# Altium PCB laser_driver2.PcbDoc (part 2 of 2)
Units mm, origin at the board's own origin, x right, y up, seen from the top; angles counter-clockwise.
Board outline 75 x 96.01 mm, 2 copper layers (TOP, BOTTOM), stack 0.264 mm thick; 144 components, 21 nets, 356 pads, 80 vias.
Unrouted connection lines stored in the file: 63.
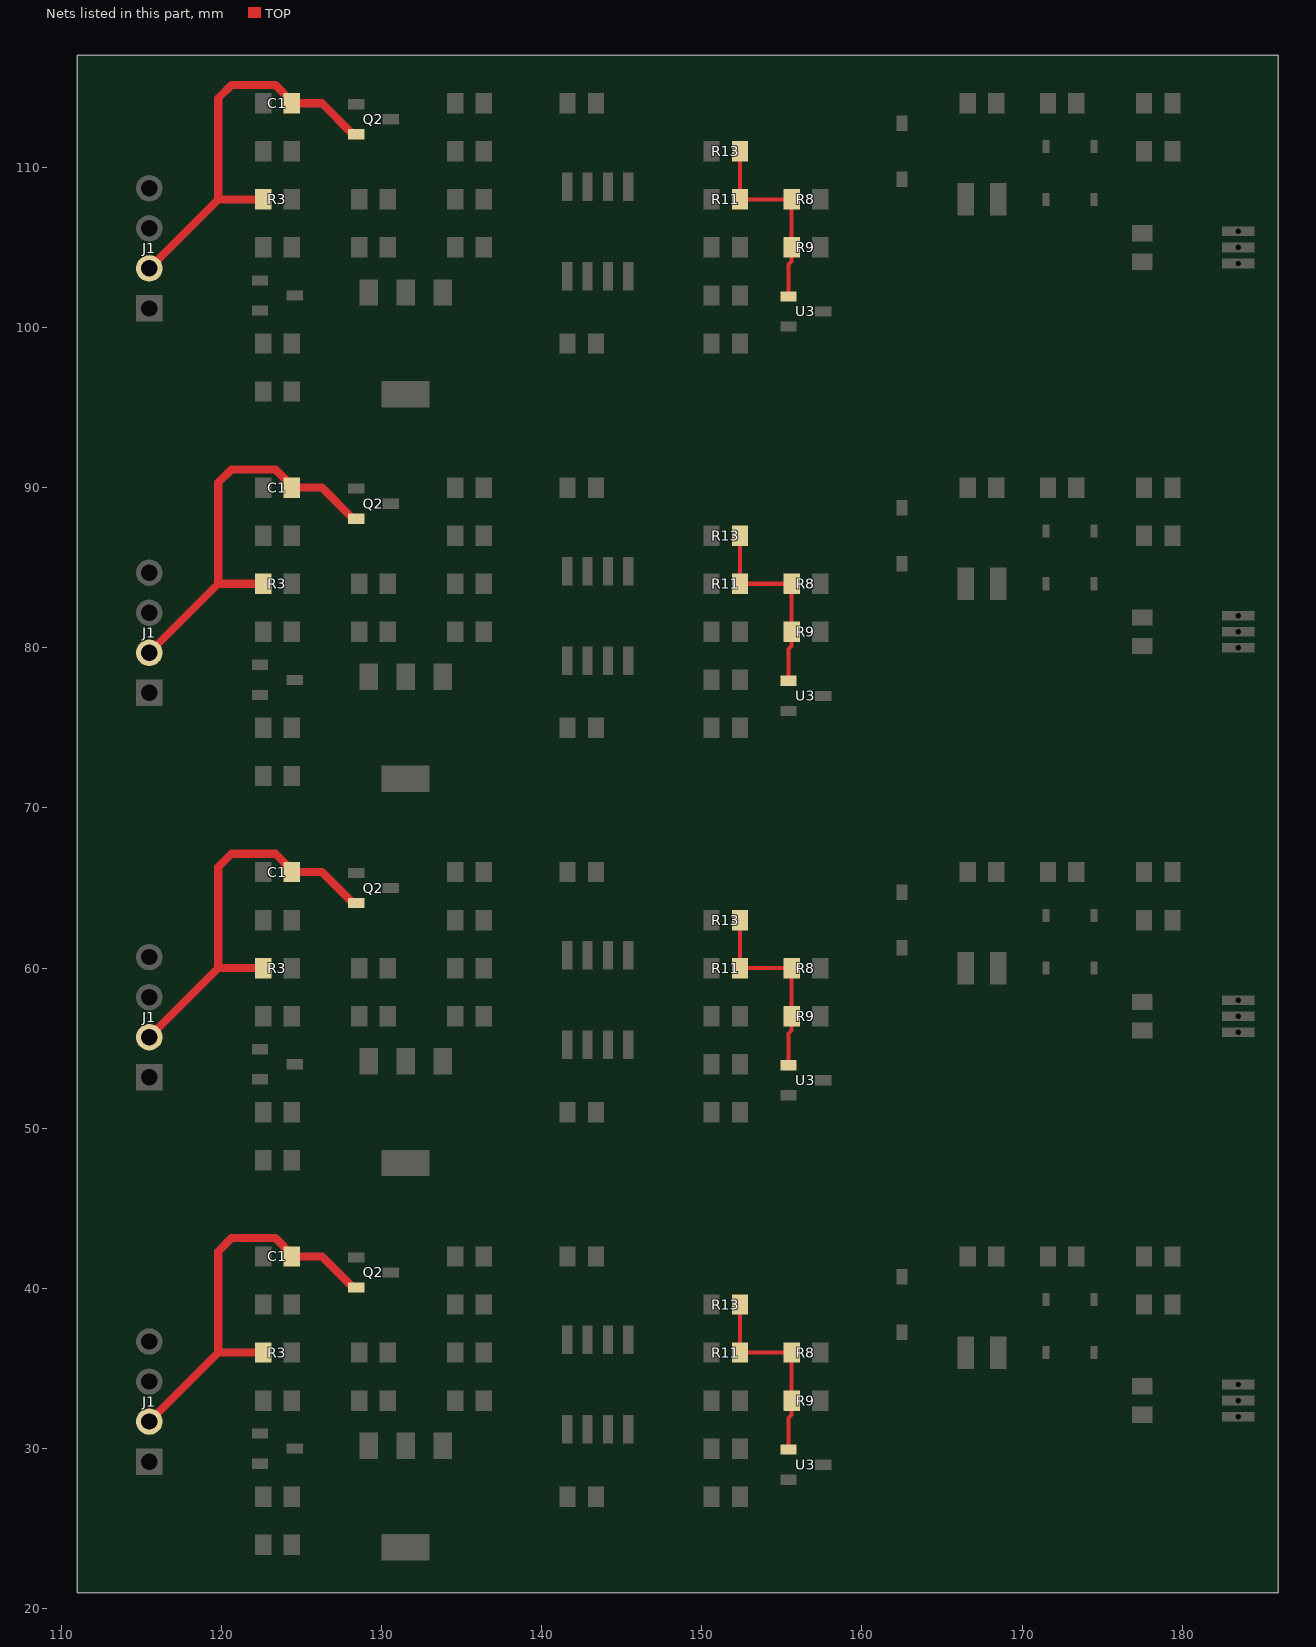
[diagram p2: the nets of this part, all layers, seen from the top]

## Via types
v1: diameter 0.61, hole 0.33, TOP to BOTTOM, 80 vias

## Nets (pads, with @x,y where several pads share a name; then routed paths per layer and width w, separated by ;. In a path a pad name is that pad's centre, name@x,y a point inside that pad or via, vN(x,y) a via of type N, cw(c..) or ccw(c..) an arc to the next point about the centre after c; other vN are vias at no path point) (continued)
VIN: C1.1 J1.2 Q2.2 R3.1 | length 102.1
  TOP w0.508: J1.2@115.5,31.681 119.81,35.991 ; J1.2@115.5,55.684 119.81,59.994 ; J1.2@115.5,79.687 119.81,83.997 ; J1.2@115.5,103.69 119.81,108 ; R3.1@122.611,35.991 119.81,35.991 ; R3.1@122.611,59.994 119.81,59.994 ; R3.1@122.611,83.997 119.81,83.997 ; R3.1@122.611,108 119.81,108 ; Q2.2@128.421,40.051 128.23,40.051 126.29,41.991 C1.1@124.389,41.991 124.389,42.118 123.373,43.134 120.643,43.134 119.81,42.301 119.81,35.991 ; Q2.2@128.421,64.054 128.23,64.054 126.29,65.994 C1.1@124.389,65.994 124.389,66.121 123.373,67.137 120.643,67.137 119.81,66.304 119.81,59.994 ; Q2.2@128.421,88.057 128.23,88.057 126.29,89.997 C1.1@124.389,89.997 124.389,90.124 123.373,91.14 120.643,91.14 119.81,90.307 119.81,83.997 ; Q2.2@128.421,112.06 128.23,112.06 126.29,114 C1.1@124.389,114 124.389,114.127 123.373,115.143 120.643,115.143 119.81,114.31 119.81,108
VREF: R8.2 R9.1 R11.1 R13.1 U3.1 | length 49.4
  TOP w0.254: R13.1@152.389,38.991 R11.1@152.389,35.991 R8.2@155.611,35.991 R9.1@155.611,32.991 155.611,32.102 155.42,31.912 U3.1@155.42,29.931 ; R13.1@152.389,62.994 R11.1@152.389,59.994 R8.2@155.611,59.994 R9.1@155.611,56.994 155.611,56.105 155.42,55.915 U3.1@155.42,53.934 ; R13.1@152.389,86.997 R11.1@152.389,83.997 R8.2@155.611,83.997 R9.1@155.611,80.997 155.611,80.108 155.42,79.918 U3.1@155.42,77.937 ; R13.1@152.389,111 R11.1@152.389,108 R8.2@155.611,108 R9.1@155.611,105 155.611,104.111 155.42,103.921 U3.1@155.42,101.94

## Polygon pours and split planes (outlines as drawn)
no net on TOP "TOP-No Net 7" (solid, pour order 16): 114.398,114 ccw(c113.5,114) 113.5,114.898 ccw(c113.5,114) 112.602,114 ccw(c113.5,114) 113.5,113.102 ccw(c113.5,114) 114.398,114
no net on TOP "TOP-No Net 6" (solid, pour order 14): 114.398,96 ccw(c113.5,96) 113.5,96.898 ccw(c113.5,96) 112.602,96 ccw(c113.5,96) 113.5,95.102 ccw(c113.5,96) 114.398,96
no net on TOP "TOP-No Net 5" (solid, pour order 12): 184.398,96 ccw(c183.5,96) 183.5,96.898 ccw(c183.5,96) 182.602,96 ccw(c183.5,96) 183.5,95.102 ccw(c183.5,96) 184.398,96
no net on TOP "TOP-No Net 4" (solid, pour order 10): 184.398,114 ccw(c183.5,114) 183.5,114.898 ccw(c183.5,114) 182.602,114 ccw(c183.5,114) 183.5,113.102 ccw(c183.5,114) 184.398,114
no net on TOP "TOP-No Net 3" (solid, pour order 6): 114.398,114 ccw(c113.5,114) 113.5,114.898 ccw(c113.5,114) 112.602,114 ccw(c113.5,114) 113.5,113.102 ccw(c113.5,114) 114.398,114
no net on TOP "TOP-No Net 2" (solid, pour order 4): 114.398,96 ccw(c113.5,96) 113.5,96.898 ccw(c113.5,96) 112.602,96 ccw(c113.5,96) 113.5,95.102 ccw(c113.5,96) 114.398,96
no net on TOP "TOP-No Net 1" (solid, pour order 2): 184.398,96 ccw(c183.5,96) 183.5,96.898 ccw(c183.5,96) 182.602,96 ccw(c183.5,96) 183.5,95.102 ccw(c183.5,96) 184.398,96
no net on TOP "TOP-No Net" (solid, pour order 0): 184.398,114 ccw(c183.5,114) 183.5,114.898 ccw(c183.5,114) 182.602,114 ccw(c183.5,114) 183.5,113.102 ccw(c183.5,114) 184.398,114
no net on TOP "TOP-No Net" (solid, pour order 18): 184.398,89.997 ccw(c183.5,89.997) 183.5,90.895 ccw(c183.5,89.997) 182.602,89.997 ccw(c183.5,89.997) 183.5,89.099 ccw(c183.5,89.997) 184.398,89.997
no net on TOP "TOP-No Net 1" (solid, pour order 20): 184.398,71.997 ccw(c183.5,71.997) 183.5,72.895 ccw(c183.5,71.997) 182.602,71.997 ccw(c183.5,71.997) 183.5,71.099 ccw(c183.5,71.997) 184.398,71.997
no net on TOP "TOP-No Net 2" (solid, pour order 22): 114.398,71.997 ccw(c113.5,71.997) 113.5,72.895 ccw(c113.5,71.997) 112.602,71.997 ccw(c113.5,71.997) 113.5,71.099 ccw(c113.5,71.997) 114.398,71.997
no net on TOP "TOP-No Net 3" (solid, pour order 24): 114.398,89.997 ccw(c113.5,89.997) 113.5,90.895 ccw(c113.5,89.997) 112.602,89.997 ccw(c113.5,89.997) 113.5,89.099 ccw(c113.5,89.997) 114.398,89.997
no net on TOP "TOP-No Net 4" (solid, pour order 26): 184.398,89.997 ccw(c183.5,89.997) 183.5,90.895 ccw(c183.5,89.997) 182.602,89.997 ccw(c183.5,89.997) 183.5,89.099 ccw(c183.5,89.997) 184.398,89.997
no net on TOP "TOP-No Net 5" (solid, pour order 28): 184.398,71.997 ccw(c183.5,71.997) 183.5,72.895 ccw(c183.5,71.997) 182.602,71.997 ccw(c183.5,71.997) 183.5,71.099 ccw(c183.5,71.997) 184.398,71.997
no net on TOP "TOP-No Net 6" (solid, pour order 30): 114.398,71.997 ccw(c113.5,71.997) 113.5,72.895 ccw(c113.5,71.997) 112.602,71.997 ccw(c113.5,71.997) 113.5,71.099 ccw(c113.5,71.997) 114.398,71.997
no net on TOP "TOP-No Net 7" (solid, pour order 32): 114.398,89.997 ccw(c113.5,89.997) 113.5,90.895 ccw(c113.5,89.997) 112.602,89.997 ccw(c113.5,89.997) 113.5,89.099 ccw(c113.5,89.997) 114.398,89.997
no net on TOP "TOP-No Net" (solid, pour order 36): 184.398,65.994 ccw(c183.5,65.994) 183.5,66.892 ccw(c183.5,65.994) 182.602,65.994 ccw(c183.5,65.994) 183.5,65.096 ccw(c183.5,65.994) 184.398,65.994
no net on TOP "TOP-No Net 1" (solid, pour order 38): 184.398,47.994 ccw(c183.5,47.994) 183.5,48.892 ccw(c183.5,47.994) 182.602,47.994 ccw(c183.5,47.994) 183.5,47.096 ccw(c183.5,47.994) 184.398,47.994
no net on TOP "TOP-No Net 2" (solid, pour order 40): 114.398,47.994 ccw(c113.5,47.994) 113.5,48.892 ccw(c113.5,47.994) 112.602,47.994 ccw(c113.5,47.994) 113.5,47.096 ccw(c113.5,47.994) 114.398,47.994
no net on TOP "TOP-No Net 3" (solid, pour order 42): 114.398,65.994 ccw(c113.5,65.994) 113.5,66.892 ccw(c113.5,65.994) 112.602,65.994 ccw(c113.5,65.994) 113.5,65.096 ccw(c113.5,65.994) 114.398,65.994
no net on TOP "TOP-No Net 4" (solid, pour order 44): 184.398,65.994 ccw(c183.5,65.994) 183.5,66.892 ccw(c183.5,65.994) 182.602,65.994 ccw(c183.5,65.994) 183.5,65.096 ccw(c183.5,65.994) 184.398,65.994
no net on TOP "TOP-No Net 5" (solid, pour order 46): 184.398,47.994 ccw(c183.5,47.994) 183.5,48.892 ccw(c183.5,47.994) 182.602,47.994 ccw(c183.5,47.994) 183.5,47.096 ccw(c183.5,47.994) 184.398,47.994
no net on TOP "TOP-No Net 6" (solid, pour order 48): 114.398,47.994 ccw(c113.5,47.994) 113.5,48.892 ccw(c113.5,47.994) 112.602,47.994 ccw(c113.5,47.994) 113.5,47.096 ccw(c113.5,47.994) 114.398,47.994
no net on TOP "TOP-No Net 7" (solid, pour order 50): 114.398,65.994 ccw(c113.5,65.994) 113.5,66.892 ccw(c113.5,65.994) 112.602,65.994 ccw(c113.5,65.994) 113.5,65.096 ccw(c113.5,65.994) 114.398,65.994
no net on TOP "TOP-No Net" (solid, pour order 54): 184.398,41.991 ccw(c183.5,41.991) 183.5,42.889 ccw(c183.5,41.991) 182.602,41.991 ccw(c183.5,41.991) 183.5,41.093 ccw(c183.5,41.991) 184.398,41.991
no net on TOP "TOP-No Net 1" (solid, pour order 56): 184.398,23.991 ccw(c183.5,23.991) 183.5,24.889 ccw(c183.5,23.991) 182.602,23.991 ccw(c183.5,23.991) 183.5,23.093 ccw(c183.5,23.991) 184.398,23.991
no net on TOP "TOP-No Net 2" (solid, pour order 58): 114.398,23.991 ccw(c113.5,23.991) 113.5,24.889 ccw(c113.5,23.991) 112.602,23.991 ccw(c113.5,23.991) 113.5,23.093 ccw(c113.5,23.991) 114.398,23.991
no net on TOP "TOP-No Net 3" (solid, pour order 60): 114.398,41.991 ccw(c113.5,41.991) 113.5,42.889 ccw(c113.5,41.991) 112.602,41.991 ccw(c113.5,41.991) 113.5,41.093 ccw(c113.5,41.991) 114.398,41.991
no net on TOP "TOP-No Net 4" (solid, pour order 62): 184.398,41.991 ccw(c183.5,41.991) 183.5,42.889 ccw(c183.5,41.991) 182.602,41.991 ccw(c183.5,41.991) 183.5,41.093 ccw(c183.5,41.991) 184.398,41.991
no net on TOP "TOP-No Net 5" (solid, pour order 64): 184.398,23.991 ccw(c183.5,23.991) 183.5,24.889 ccw(c183.5,23.991) 182.602,23.991 ccw(c183.5,23.991) 183.5,23.093 ccw(c183.5,23.991) 184.398,23.991
no net on TOP "TOP-No Net 6" (solid, pour order 66): 114.398,23.991 ccw(c113.5,23.991) 113.5,24.889 ccw(c113.5,23.991) 112.602,23.991 ccw(c113.5,23.991) 113.5,23.093 ccw(c113.5,23.991) 114.398,23.991
no net on TOP "TOP-No Net 7" (solid, pour order 68): 114.398,41.991 ccw(c113.5,41.991) 113.5,42.889 ccw(c113.5,41.991) 112.602,41.991 ccw(c113.5,41.991) 113.5,41.093 ccw(c113.5,41.991) 114.398,41.991
GND on BOTTOM "BOTTOM-GND" (solid, pour order 8): 118.5,94 118.5,96 116.5,98 112,98 112,110 115.5,110 120.5,115 120.5,116 180.5,116 180.5,115 181.5,114 181.5,112 182.5,111 183.5,111 185,109.5 185,104 184.643,104 184.643,104.432 182.357,104.432 182.357,104 181.934,104 181.93,104.046 181.924,104.083 181.915,104.119 181.903,104.155 181.888,104.19 181.87,104.223 181.849,104.254 181.826,104.284 181.8,104.311 181.772,104.336 181.741,104.358 181.709,104.378 181.675,104.395 181.64,104.409 181.604,104.419 181.567,104.427 181.53,104.431 181.492,104.432 181.454,104.43 181.417,104.424 181.381,104.415 181.345,104.403 181.31,104.388 181.277,104.37 181.246,104.349 181.216,104.326 181.189,104.3 181.164,104.272 181.142,104.241 181.122,104.209 181.105,104.175 181.091,104.14 181.081,104.104 181.073,104.067 181.07,104.046 181.066,104 180.5,104 180.5,102 176.5,98 153.5,98 151.5,100 151.5,102 150.5,103 148.5,103 147.5,102 145.5,102 144.5,103 144.5,104 146.5,104 147.5,105 147.5,109 146.5,110 141.5,110 137.5,106 137.5,98 133.5,94 118.5,94
GND on BOTTOM "BOTTOM-GND" (solid, pour order 34): 118.5,69.997 118.5,71.997 116.5,73.997 112,73.997 112,85.997 115.5,85.997 120.5,90.997 120.5,91.997 180.5,91.997 180.5,90.997 181.5,89.997 181.5,87.997 182.5,86.997 183.5,86.997 185,85.497 185,79.997 184.643,79.997 184.643,80.429 182.357,80.429 182.357,79.997 181.934,79.997 181.93,80.043 181.924,80.08 181.915,80.116 181.903,80.152 181.888,80.187 181.87,80.22 181.849,80.251 181.826,80.281 181.8,80.308 181.772,80.333 181.741,80.355 181.709,80.375 181.675,80.392 181.64,80.406 181.604,80.416 181.567,80.424 181.53,80.428 181.492,80.429 181.454,80.427 181.417,80.421 181.381,80.412 181.345,80.4 181.31,80.385 181.277,80.367 181.246,80.346 181.216,80.323 181.189,80.297 181.164,80.269 181.142,80.238 181.122,80.206 181.105,80.172 181.091,80.137 181.081,80.101 181.073,80.064 181.07,80.043 181.066,79.997 180.5,79.997 180.5,77.997 176.5,73.997 153.5,73.997 151.5,75.997 151.5,77.997 150.5,78.997 148.5,78.997 147.5,77.997 145.5,77.997 144.5,78.997 144.5,79.997 146.5,79.997 147.5,80.997 147.5,84.997 146.5,85.997 141.5,85.997 137.5,81.997 137.5,73.997 133.5,69.997 118.5,69.997
GND on BOTTOM "BOTTOM-GND" (solid, pour order 52): 118.5,45.994 118.5,47.994 116.5,49.994 112,49.994 112,61.994 115.5,61.994 120.5,66.994 120.5,67.994 180.5,67.994 180.5,66.994 181.5,65.994 181.5,63.994 182.5,62.994 183.5,62.994 185,61.494 185,55.994 184.643,55.994 184.643,56.426 182.357,56.426 182.357,55.994 181.934,55.994 181.93,56.04 181.924,56.077 181.915,56.113 181.903,56.149 181.888,56.184 181.87,56.217 181.849,56.248 181.826,56.278 181.8,56.305 181.772,56.33 181.741,56.352 181.709,56.372 181.675,56.389 181.64,56.403 181.604,56.413 181.567,56.421 181.53,56.425 181.492,56.426 181.454,56.424 181.417,56.418 181.381,56.409 181.345,56.397 181.31,56.382 181.277,56.364 181.246,56.343 181.216,56.32 181.189,56.294 181.164,56.266 181.142,56.235 181.122,56.203 181.105,56.169 181.091,56.134 181.081,56.098 181.073,56.061 181.07,56.04 181.066,55.994 180.5,55.994 180.5,53.994 176.5,49.994 153.5,49.994 151.5,51.994 151.5,53.994 150.5,54.994 148.5,54.994 147.5,53.994 145.5,53.994 144.5,54.994 144.5,55.994 146.5,55.994 147.5,56.994 147.5,60.994 146.5,61.994 141.5,61.994 137.5,57.994 137.5,49.994 133.5,45.994 118.5,45.994
GND on BOTTOM "BOTTOM-GND" (solid, pour order 70): 118.5,21.991 118.5,23.991 116.5,25.991 112,25.991 112,37.991 115.5,37.991 120.5,42.991 120.5,43.991 180.5,43.991 180.5,42.991 181.5,41.991 181.5,39.991 182.5,38.991 183.5,38.991 185,37.491 185,31.991 184.643,31.991 184.643,32.423 182.357,32.423 182.357,31.991 181.934,31.991 181.93,32.037 181.924,32.074 181.915,32.11 181.903,32.146 181.888,32.181 181.87,32.214 181.849,32.245 181.826,32.275 181.8,32.302 181.772,32.327 181.741,32.349 181.709,32.369 181.675,32.386 181.64,32.4 181.604,32.41 181.567,32.418 181.53,32.422 181.492,32.423 181.454,32.421 181.417,32.415 181.381,32.406 181.345,32.394 181.31,32.379 181.277,32.361 181.246,32.34 181.216,32.317 181.189,32.291 181.164,32.263 181.142,32.232 181.122,32.2 181.105,32.166 181.091,32.131 181.081,32.095 181.073,32.058 181.07,32.037 181.066,31.991 180.5,31.991 180.5,29.991 176.5,25.991 153.5,25.991 151.5,27.991 151.5,29.991 150.5,30.991 148.5,30.991 147.5,29.991 145.5,29.991 144.5,30.991 144.5,31.991 146.5,31.991 147.5,32.991 147.5,36.991 146.5,37.991 141.5,37.991 137.5,33.991 137.5,25.991 133.5,21.991 118.5,21.991
no net on Top Solder (solid): 114.416,114 ccw(c113.5,114) 113.5,114.916 ccw(c113.5,114) 112.584,114 ccw(c113.5,114) 113.5,113.084 ccw(c113.5,114) 114.416,114
no net on Top Solder (solid): 114.416,96 ccw(c113.5,96) 113.5,96.916 ccw(c113.5,96) 112.584,96 ccw(c113.5,96) 113.5,95.084 ccw(c113.5,96) 114.416,96
no net on Top Solder (solid): 184.416,96 ccw(c183.5,96) 183.5,96.916 ccw(c183.5,96) 182.584,96 ccw(c183.5,96) 183.5,95.084 ccw(c183.5,96) 184.416,96
no net on Top Solder (solid): 184.416,114 ccw(c183.5,114) 183.5,114.916 ccw(c183.5,114) 182.584,114 ccw(c183.5,114) 183.5,113.084 ccw(c183.5,114) 184.416,114
no net on Top Solder (solid): 184.416,89.997 ccw(c183.5,89.997) 183.5,90.913 ccw(c183.5,89.997) 182.584,89.997 ccw(c183.5,89.997) 183.5,89.081 ccw(c183.5,89.997) 184.416,89.997
no net on Top Solder (solid): 184.416,71.997 ccw(c183.5,71.997) 183.5,72.913 ccw(c183.5,71.997) 182.584,71.997 ccw(c183.5,71.997) 183.5,71.081 ccw(c183.5,71.997) 184.416,71.997
no net on Top Solder (solid): 114.416,71.997 ccw(c113.5,71.997) 113.5,72.913 ccw(c113.5,71.997) 112.584,71.997 ccw(c113.5,71.997) 113.5,71.081 ccw(c113.5,71.997) 114.416,71.997
no net on Top Solder (solid): 114.416,89.997 ccw(c113.5,89.997) 113.5,90.913 ccw(c113.5,89.997) 112.584,89.997 ccw(c113.5,89.997) 113.5,89.081 ccw(c113.5,89.997) 114.416,89.997
no net on Top Solder (solid): 184.416,65.994 ccw(c183.5,65.994) 183.5,66.91 ccw(c183.5,65.994) 182.584,65.994 ccw(c183.5,65.994) 183.5,65.078 ccw(c183.5,65.994) 184.416,65.994
no net on Top Solder (solid): 184.416,47.994 ccw(c183.5,47.994) 183.5,48.91 ccw(c183.5,47.994) 182.584,47.994 ccw(c183.5,47.994) 183.5,47.078 ccw(c183.5,47.994) 184.416,47.994
no net on Top Solder (solid): 114.416,47.994 ccw(c113.5,47.994) 113.5,48.91 ccw(c113.5,47.994) 112.584,47.994 ccw(c113.5,47.994) 113.5,47.078 ccw(c113.5,47.994) 114.416,47.994
no net on Top Solder (solid): 114.416,65.994 ccw(c113.5,65.994) 113.5,66.91 ccw(c113.5,65.994) 112.584,65.994 ccw(c113.5,65.994) 113.5,65.078 ccw(c113.5,65.994) 114.416,65.994
no net on Top Solder (solid): 184.416,41.991 ccw(c183.5,41.991) 183.5,42.907 ccw(c183.5,41.991) 182.584,41.991 ccw(c183.5,41.991) 183.5,41.075 ccw(c183.5,41.991) 184.416,41.991
no net on Top Solder (solid): 184.416,23.991 ccw(c183.5,23.991) 183.5,24.907 ccw(c183.5,23.991) 182.584,23.991 ccw(c183.5,23.991) 183.5,23.075 ccw(c183.5,23.991) 184.416,23.991
no net on Top Solder (solid): 114.416,23.991 ccw(c113.5,23.991) 113.5,24.907 ccw(c113.5,23.991) 112.584,23.991 ccw(c113.5,23.991) 113.5,23.075 ccw(c113.5,23.991) 114.416,23.991
no net on Top Solder (solid): 114.416,41.991 ccw(c113.5,41.991) 113.5,42.907 ccw(c113.5,41.991) 112.584,41.991 ccw(c113.5,41.991) 113.5,41.075 ccw(c113.5,41.991) 114.416,41.991

## Keep-outs
TOP:
  circle w0.025: c113.5,114 r1.524
  circle w0.025: c113.5,96 r1.524
  circle w0.025: c183.5,96 r1.524
  circle w0.025: c183.5,114 r1.524
  circle w0.025: c113.5,114 r1.524
  circle w0.025: c113.5,96 r1.524
  circle w0.025: c183.5,96 r1.524
  circle w0.025: c183.5,114 r1.524
  circle w0.025: c183.5,89.997 r1.524
  circle w0.025: c183.5,71.997 r1.524
  circle w0.025: c113.5,71.997 r1.524
  circle w0.025: c113.5,89.997 r1.524
  circle w0.025: c183.5,89.997 r1.524
  circle w0.025: c183.5,71.997 r1.524
  circle w0.025: c113.5,71.997 r1.524
  circle w0.025: c113.5,89.997 r1.524
  circle w0.025: c183.5,65.994 r1.524
  circle w0.025: c183.5,47.994 r1.524
  circle w0.025: c113.5,47.994 r1.524
  circle w0.025: c113.5,65.994 r1.524
  circle w0.025: c183.5,65.994 r1.524
  circle w0.025: c183.5,47.994 r1.524
  circle w0.025: c113.5,47.994 r1.524
  circle w0.025: c113.5,65.994 r1.524
  circle w0.025: c183.5,41.991 r1.524
  circle w0.025: c183.5,23.991 r1.524
  circle w0.025: c113.5,23.991 r1.524
  circle w0.025: c113.5,41.991 r1.524
  circle w0.025: c183.5,41.991 r1.524
  circle w0.025: c183.5,23.991 r1.524
  circle w0.025: c113.5,23.991 r1.524
  circle w0.025: c113.5,41.991 r1.524

## Other copper
TOP:
  region net GND: 172.745,107.594 172.745,108.406 172.135,108.406 172.135,111.708 173.862,111.708 173.862,108.406 173.253,108.406 173.253,107.594 172.745,107.594
  region net GND: 172.745,83.591 172.745,84.403 172.135,84.403 172.135,87.705 173.862,87.705 173.862,84.403 173.253,84.403 173.253,83.591 172.745,83.591
  region net GND: 172.745,59.588 172.745,60.4 172.135,60.4 172.135,63.702 173.862,63.702 173.862,60.4 173.253,60.4 173.253,59.588 172.745,59.588
  region net GND: 172.745,35.585 172.745,36.397 172.135,36.397 172.135,39.699 173.862,39.699 173.862,36.397 173.253,36.397 173.253,35.585 172.745,35.585
BOTTOM:
  pour cut-out: 0,0 0.254,0 0.254,0.254 0,0.254
  pour cut-out: 0,0 0.254,0 0.254,0.254 0,0.254
  pour cut-out: 0,0 0.254,0 0.254,0.254 0,0.254
  pour cut-out: 0,0 0.254,0 0.254,0.254 0,0.254
  pour cut-out: 116.461,103.69 116.428,103.939 116.332,104.171 116.179,104.37 115.98,104.522 115.749,104.618 115.5,104.651 115.251,104.618 115.02,104.522 114.821,104.37 114.668,104.171 114.572,103.939 114.539,103.69 114.572,103.441 114.668,103.21 114.821,103.011 115.02,102.858 115.251,102.762 115.5,102.729 115.749,102.762 115.98,102.858 116.179,103.011 116.332,103.21 116.428,103.441 116.461,103.69
  pour cut-out: 116.461,106.19 116.428,106.439 116.332,106.67 116.179,106.869 115.98,107.022 115.749,107.118 115.5,107.151 115.251,107.118 115.02,107.022 114.821,106.869 114.668,106.67 114.572,106.439 114.539,106.19 114.572,105.941 114.668,105.71 114.821,105.511 115.02,105.358 115.251,105.262 115.5,105.229 115.749,105.262 115.98,105.358 116.179,105.511 116.332,105.71 116.428,105.941 116.461,106.19
  pour cut-out: 0,0 0.254,0 0.254,0.254 0,0.254
  pour cut-out: 0,0 0.254,0 0.254,0.254 0,0.254
  pour cut-out: 0,0 0.254,0 0.254,0.254 0,0.254
  pour cut-out: 0,0 0.254,0 0.254,0.254 0,0.254
  pour cut-out: 0,0 0.254,0 0.254,0.254 0,0.254
  pour cut-out: 0,0 0.254,0 0.254,0.254 0,0.254
  pour cut-out: 0,0 0.254,0 0.254,0.254 0,0.254
  pour cut-out: 0,0 0.254,0 0.254,0.254 0,0.254
  pour cut-out: 0,0 0.254,0 0.254,0.254 0,0.254
  pour cut-out: 0,0 0.254,0 0.254,0.254 0,0.254
  pour cut-out: 0,0 0.254,0 0.254,0.254 0,0.254
  pour cut-out: 0,0 0.254,0 0.254,0.254 0,0.254
  pour cut-out: 0,0 0.254,0 0.254,0.254 0,0.254
  pour cut-out: 0,0 0.254,0 0.254,0.254 0,0.254
  pour cut-out: 0,0 0.254,0 0.254,0.254 0,0.254
  pour cut-out: 0,0 0.254,0 0.254,0.254 0,0.254
  pour cut-out: 0,0 0.254,0 0.254,0.254 0,0.254
  pour cut-out: 0,0 0.254,0 0.254,0.254 0,0.254
  pour cut-out: 0,0 0.254,0 0.254,0.254 0,0.254
  pour cut-out: 0,0 0.254,0 0.254,0.254 0,0.254
  pour cut-out: 0,0 0.254,0 0.254,0.254 0,0.254
  pour cut-out: 0,0 0.254,0 0.254,0.254 0,0.254
  pour cut-out: 0,0 0.254,0 0.254,0.254 0,0.254
  pour cut-out: 0,0 0.254,0 0.254,0.254 0,0.254
  pour cut-out: 0,0 0.254,0 0.254,0.254 0,0.254
  pour cut-out: 0,0 0.254,0 0.254,0.254 0,0.254
  pour cut-out: 0,0 0.254,0 0.254,0.254 0,0.254
  pour cut-out: 0,0 0.254,0 0.254,0.254 0,0.254
  pour cut-out: 0,0 0.254,0 0.254,0.254 0,0.254
  pour cut-out: 0,0 0.254,0 0.254,0.254 0,0.254
  pour cut-out: 0,0 0.254,0 0.254,0.254 0,0.254
  pour cut-out: 0,0 0.254,0 0.254,0.254 0,0.254
  pour cut-out: 0,0 0.254,0 0.254,0.254 0,0.254
  pour cut-out: 0,0 0.254,0 0.254,0.254 0,0.254
  pour cut-out: 0,0 0.254,0 0.254,0.254 0,0.254
  pour cut-out: 0,0 0.254,0 0.254,0.254 0,0.254
  pour cut-out: 0,0 0.254,0 0.254,0.254 0,0.254
  pour cut-out: 0,0 0.254,0 0.254,0.254 0,0.254
  pour cut-out: 0,0 0.254,0 0.254,0.254 0,0.254
  pour cut-out: 0,0 0.254,0 0.254,0.254 0,0.254
  pour cut-out: 0,0 0.254,0 0.254,0.254 0,0.254
  pour cut-out: 0,0 0.254,0 0.254,0.254 0,0.254
  pour cut-out: 0,0 0.254,0 0.254,0.254 0,0.254
  pour cut-out: 0,0 0.254,0 0.254,0.254 0,0.254
  pour cut-out: 0,0 0.254,0 0.254,0.254 0,0.254
  pour cut-out: 0,0 0.254,0 0.254,0.254 0,0.254
  pour cut-out: 0,0 0.254,0 0.254,0.254 0,0.254
  pour cut-out: 0,0 0.254,0 0.254,0.254 0,0.254
  pour cut-out: 0,0 0.254,0 0.254,0.254 0,0.254
  pour cut-out: 0,0 0.254,0 0.254,0.254 0,0.254
  pour cut-out: 0,0 0.254,0 0.254,0.254 0,0.254
  pour cut-out: 0,0 0.254,0 0.254,0.254 0,0.254
  pour cut-out: 0,0 0.254,0 0.254,0.254 0,0.254
  pour cut-out: 0,0 0.254,0 0.254,0.254 0,0.254
  pour cut-out: 0,0 0.254,0 0.254,0.254 0,0.254
  pour cut-out: 116.461,82.187 116.428,82.436 116.332,82.667 116.179,82.866 115.98,83.019 115.749,83.115 115.5,83.148 115.251,83.115 115.02,83.019 114.821,82.866 114.668,82.667 114.572,82.436 114.539,82.187 114.572,81.938 114.668,81.707 114.821,81.508 115.02,81.355 115.251,81.259 115.5,81.226 115.749,81.259 115.98,81.355 116.179,81.508 116.332,81.707 116.428,81.938 116.461,82.187
  pour cut-out: 116.461,79.687 116.428,79.936 116.332,80.168 116.179,80.367 115.98,80.519 115.749,80.615 115.5,80.648 115.251,80.615 115.02,80.519 114.821,80.367 114.668,80.168 114.572,79.936 114.539,79.687 114.572,79.438 114.668,79.207 114.821,79.008 115.02,78.855 115.251,78.759 115.5,78.726 115.749,78.759 115.98,78.855 116.179,79.008 116.332,79.207 116.428,79.438 116.461,79.687
  pour cut-out: 116.461,58.184 116.428,58.433 116.332,58.664 116.179,58.863 115.98,59.016 115.749,59.112 115.5,59.145 115.251,59.112 115.02,59.016 114.821,58.863 114.668,58.664 114.572,58.433 114.539,58.184 114.572,57.935 114.668,57.704 114.821,57.505 115.02,57.352 115.251,57.256 115.5,57.223 115.749,57.256 115.98,57.352 116.179,57.505 116.332,57.704 116.428,57.935 116.461,58.184
  pour cut-out: 116.461,55.684 116.428,55.933 116.332,56.165 116.179,56.364 115.98,56.516 115.749,56.612 115.5,56.645 115.251,56.612 115.02,56.516 114.821,56.364 114.668,56.165 114.572,55.933 114.539,55.684 114.572,55.435 114.668,55.204 114.821,55.005 115.02,54.852 115.251,54.756 115.5,54.723 115.749,54.756 115.98,54.852 116.179,55.005 116.332,55.204 116.428,55.435 116.461,55.684
  pour cut-out: 116.461,34.181 116.428,34.43 116.332,34.661 116.179,34.86 115.98,35.013 115.749,35.109 115.5,35.142 115.251,35.109 115.02,35.013 114.821,34.86 114.668,34.661 114.572,34.43 114.539,34.181 114.572,33.932 114.668,33.701 114.821,33.502 115.02,33.349 115.251,33.253 115.5,33.22 115.749,33.253 115.98,33.349 116.179,33.502 116.332,33.701 116.428,33.932 116.461,34.181
  pour cut-out: 116.461,31.681 116.428,31.93 116.332,32.162 116.179,32.361 115.98,32.513 115.749,32.609 115.5,32.642 115.251,32.609 115.02,32.513 114.821,32.361 114.668,32.162 114.572,31.93 114.539,31.681 114.572,31.432 114.668,31.201 114.821,31.002 115.02,30.849 115.251,30.753 115.5,30.72 115.749,30.753 115.98,30.849 116.179,31.002 116.332,31.201 116.428,31.432 116.461,31.681
Multi-Layer:
  lines w0.025: 112,21.991 185,21.991 ; 112,21.991 112,43.991 ; 112,21.991 185,21.991 ; 112,21.991 112,43.991 ; 112,43.991 185,43.991 ; 112,43.991 185,43.991 ; 112,45.994 185,45.994 ; 112,45.994 112,67.994 ; 112,45.994 185,45.994 ; 112,45.994 112,67.994 ; 112,67.994 185,67.994 ; 112,67.994 185,67.994 ; 112,69.997 185,69.997 ; 112,69.997 112,91.997 ; 112,69.997 185,69.997 ; 112,69.997 112,91.997 ; 112,91.997 185,91.997 ; 112,91.997 185,91.997 ; 112,94 112,116 ; 112,94 185,94 ; 112,94 112,116 ; 112,94 185,94 ; 112,116 185,116 ; 112,116 185,116 ; 185,21.991 185,43.991 ; 185,21.991 185,43.991 ; 185,45.994 185,67.994 ; 185,45.994 185,67.994 ; 185,69.997 185,91.997 ; 185,69.997 185,91.997 ; 185,94 185,116 ; 185,94 185,116

## Silkscreen, mask and mechanical layers (free items; w line width, h text height)
Top Overlay:
  text "LASER DRIVER BOARD V1.0" at 151.257,95.377 h1
  text "LASER DRIVER BOARD V1.0" at 151.257,71.247 h1
  text "LASER DRIVER BOARD V1.0" at 151.13,47.371 h1
  text "LASER DRIVER BOARD V1.0" at 151.257,23.495 h1
Top Solder:
  pour cut-out: 172.618,107.467 172.618,108.279 172.008,108.279 172.008,111.835 173.989,111.835 173.989,108.279 173.38,108.279 173.38,107.467 172.618,107.467
  pour cut-out: 172.618,83.464 172.618,84.276 172.008,84.276 172.008,87.832 173.989,87.832 173.989,84.276 173.38,84.276 173.38,83.464 172.618,83.464
  pour cut-out: 172.618,59.461 172.618,60.273 172.008,60.273 172.008,63.829 173.989,63.829 173.989,60.273 173.38,60.273 173.38,59.461 172.618,59.461
  pour cut-out: 172.618,35.458 172.618,36.27 172.008,36.27 172.008,39.826 173.989,39.826 173.989,36.27 173.38,36.27 173.38,35.458 172.618,35.458
NCLEGEND-1-2:
  lines w0.025: 195.5,90.1 318.334,90.1 ; 195.5,96.45 318.334,96.45 ; 195.5,102.8 318.334,102.8 ; 195.5,109.15 318.334,109.15 ; 195.5,115.5 318.334,115.5 ; 218.335,83.75 218.335,109.15 ; 266.366,83.75 266.366,109.15 ; 298.649,83.75 298.649,109.15 ; 195.5,83.75 195.5,122 318.334,122 318.334,83.75 195.5,83.75 ; 206.409,86.925 206.663,86.417 207.171,86.417 207.425,86.925 207.171,87.433 206.663,87.433 206.409,86.925 ; 206.663,93.021 206.663,93.529 207.171,93.529 207.171,93.021 206.663,93.021 ; 206.752,99.46 207.082,99.46 207.082,99.79 206.752,99.79 206.752,99.46
  text "DRILL CHART: TOP to BOTTOM" at 223.897,117.237 h3.17
  text "ALL UNITS ARE IN MILLIMETERS" at 221.357,110.738 h3.17
  text "FIGURE" at 199.297,104.388 h3.17
  text "SIZE" at 237.27,104.388 h3.17
  text "PLATED" at 274.888,104.388 h3.17
  text "QTY" at 304.682,104.388 h3.17
  text "0.3302" at 234.73,98.038 h3.17
  text "PLATED" at 274.888,98.038 h3.17
  text "20" at 305.952,98.038 h3.17
  text "0.3302" at 234.73,91.688 h3.17
  text "PLATED" at 274.888,91.688 h3.17
  text "3" at 307.222,91.688 h3.17
  text "1.016" at 236,85.338 h3.17
  text "PLATED" at 274.888,85.338 h3.17
  text "4" at 307.222,85.338 h3.17
OUTLINE:
  lines w0.025: 111,20.991 111,44.991 186,44.991 186,20.991 111,20.991 ; 111,44.994 111,68.994 186,68.994 186,44.994 111,44.994 ; 111,68.997 111,92.997 186,92.997 186,68.997 111,68.997 ; 111,93 186,93 186,117 111,117 111,93
AUTOSILK_TOP:
  text "LASER DRIVER BOARD V1.0" at 164.5,99 h0.79
  text "LASER DRIVER BOARD V1.0" at 164.5,74.997 h0.79
  text "LASER DRIVER BOARD V1.0" at 164.5,50.994 h0.79
  text "LASER DRIVER BOARD V1.0" at 164.5,26.991 h0.79
DRAWING_ORIGIN:
  lines w0.025: 148.3,32.991 148.7,32.991 ; 148.3,56.994 148.7,56.994 ; 148.3,80.997 148.7,80.997 ; 148.3,105 148.7,105 ; 148.5,32.791 148.5,33.191 ; 148.5,56.794 148.5,57.194 ; 148.5,80.797 148.5,81.197 ; 148.5,104.8 148.5,105.2

## Text inside footprints (layer, text, board x,y; h text height)
C1: PIN_NUMBER "1" at 124.074,114 h0.79 r180; PIN_NUMBER "2" at 122.296,114 h0.79 r180; DIMENSION "80" at 123.805,115.651 h0.51 r180; DIMENSION "50" at 121.595,114.229 h0.51 r180
C1: PIN_NUMBER "1" at 124.074,89.997 h0.79 r180; PIN_NUMBER "2" at 122.296,89.997 h0.79 r180; DIMENSION "80" at 123.805,91.648 h0.51 r180; DIMENSION "50" at 121.595,90.226 h0.51 r180
C1: PIN_NUMBER "1" at 124.074,65.994 h0.79 r180; PIN_NUMBER "2" at 122.296,65.994 h0.79 r180; DIMENSION "80" at 123.805,67.645 h0.51 r180; DIMENSION "50" at 121.595,66.223 h0.51 r180
C1: PIN_NUMBER "1" at 124.074,41.991 h0.79 r180; PIN_NUMBER "2" at 122.296,41.991 h0.79 r180; DIMENSION "80" at 123.805,43.642 h0.51 r180; DIMENSION "50" at 121.595,42.22 h0.51 r180
C2: PIN_NUMBER "2" at 128.296,108 h0.79 r180; PIN_NUMBER "1" at 130.074,108 h0.79 r180; DIMENSION "80" at 129.805,109.651 h0.51 r180; DIMENSION "50" at 127.595,108.229 h0.51 r180
C2: PIN_NUMBER "2" at 128.296,83.997 h0.79 r180; PIN_NUMBER "1" at 130.074,83.997 h0.79 r180; DIMENSION "80" at 129.805,85.648 h0.51 r180; DIMENSION "50" at 127.595,84.226 h0.51 r180
C2: PIN_NUMBER "2" at 128.296,59.994 h0.79 r180; PIN_NUMBER "1" at 130.074,59.994 h0.79 r180; DIMENSION "80" at 129.805,61.645 h0.51 r180; DIMENSION "50" at 127.595,60.223 h0.51 r180
C2: PIN_NUMBER "2" at 128.296,35.991 h0.79 r180; PIN_NUMBER "1" at 130.074,35.991 h0.79 r180; DIMENSION "80" at 129.805,37.642 h0.51 r180; DIMENSION "50" at 127.595,36.22 h0.51 r180
C3: PIN_NUMBER "2" at 128.296,105 h0.79 r180; PIN_NUMBER "1" at 130.074,105 h0.79 r180; DIMENSION "80" at 129.805,106.651 h0.51 r180; DIMENSION "50" at 127.595,105.229 h0.51 r180
C3: PIN_NUMBER "2" at 128.296,80.997 h0.79 r180; PIN_NUMBER "1" at 130.074,80.997 h0.79 r180; DIMENSION "80" at 129.805,82.648 h0.51 r180; DIMENSION "50" at 127.595,81.226 h0.51 r180
C3: PIN_NUMBER "2" at 128.296,56.994 h0.79 r180; PIN_NUMBER "1" at 130.074,56.994 h0.79 r180; DIMENSION "80" at 129.805,58.645 h0.51 r180; DIMENSION "50" at 127.595,57.223 h0.51 r180
C3: PIN_NUMBER "2" at 128.296,32.991 h0.79 r180; PIN_NUMBER "1" at 130.074,32.991 h0.79 r180; DIMENSION "80" at 129.805,34.642 h0.51 r180; DIMENSION "50" at 127.595,33.22 h0.51 r180
C4: PIN_NUMBER "2" at 136.074,108 h0.79; PIN_NUMBER "1" at 134.296,108 h0.79; DIMENSION "80" at 135.195,106.349 h0.51; DIMENSION "50" at 137.405,107.771 h0.51
C4: PIN_NUMBER "2" at 136.074,83.997 h0.79; PIN_NUMBER "1" at 134.296,83.997 h0.79; DIMENSION "80" at 135.195,82.346 h0.51; DIMENSION "50" at 137.405,83.768 h0.51
C4: PIN_NUMBER "2" at 136.074,59.994 h0.79; PIN_NUMBER "1" at 134.296,59.994 h0.79; DIMENSION "80" at 135.195,58.343 h0.51; DIMENSION "50" at 137.405,59.765 h0.51
C4: PIN_NUMBER "2" at 136.074,35.991 h0.79; PIN_NUMBER "1" at 134.296,35.991 h0.79; DIMENSION "80" at 135.195,34.34 h0.51; DIMENSION "50" at 137.405,35.762 h0.51
C5: PIN_NUMBER "2" at 136.074,105 h0.79; PIN_NUMBER "1" at 134.296,105 h0.79; DIMENSION "80" at 135.195,103.349 h0.51; DIMENSION "50" at 137.405,104.771 h0.51
C5: PIN_NUMBER "2" at 136.074,80.997 h0.79; PIN_NUMBER "1" at 134.296,80.997 h0.79; DIMENSION "80" at 135.195,79.346 h0.51; DIMENSION "50" at 137.405,80.768 h0.51
C5: PIN_NUMBER "2" at 136.074,56.994 h0.79; PIN_NUMBER "1" at 134.296,56.994 h0.79; DIMENSION "80" at 135.195,55.343 h0.51; DIMENSION "50" at 137.405,56.765 h0.51
C5: PIN_NUMBER "2" at 136.074,32.991 h0.79; PIN_NUMBER "1" at 134.296,32.991 h0.79; DIMENSION "80" at 135.195,31.34 h0.51; DIMENSION "50" at 137.405,32.762 h0.51
C6: PIN_NUMBER "2" at 152.074,102 h0.79; PIN_NUMBER "1" at 150.296,102 h0.79; DIMENSION "80" at 151.195,100.349 h0.51; DIMENSION "50" at 153.405,101.771 h0.51
C6: PIN_NUMBER "2" at 152.074,77.997 h0.79; PIN_NUMBER "1" at 150.296,77.997 h0.79; DIMENSION "80" at 151.195,76.346 h0.51; DIMENSION "50" at 153.405,77.768 h0.51
C6: PIN_NUMBER "2" at 152.074,53.994 h0.79; PIN_NUMBER "1" at 150.296,53.994 h0.79; DIMENSION "80" at 151.195,52.343 h0.51; DIMENSION "50" at 153.405,53.765 h0.51
C6: PIN_NUMBER "2" at 152.074,29.991 h0.79; PIN_NUMBER "1" at 150.296,29.991 h0.79; DIMENSION "80" at 151.195,28.34 h0.51; DIMENSION "50" at 153.405,29.762 h0.51
C7: PIN_NUMBER "2" at 179.074,114 h0.79; PIN_NUMBER "1" at 177.296,114 h0.79; DIMENSION "80" at 178.195,112.349 h0.51; DIMENSION "50" at 180.405,113.771 h0.51
C7: PIN_NUMBER "2" at 179.074,89.997 h0.79; PIN_NUMBER "1" at 177.296,89.997 h0.79; DIMENSION "80" at 178.195,88.346 h0.51; DIMENSION "50" at 180.405,89.768 h0.51
C7: PIN_NUMBER "2" at 179.074,65.994 h0.79; PIN_NUMBER "1" at 177.296,65.994 h0.79; DIMENSION "80" at 178.195,64.343 h0.51; DIMENSION "50" at 180.405,65.765 h0.51
C7: PIN_NUMBER "2" at 179.074,41.991 h0.79; PIN_NUMBER "1" at 177.296,41.991 h0.79; DIMENSION "80" at 178.195,40.34 h0.51; DIMENSION "50" at 180.405,41.762 h0.51
C8: PIN_NUMBER "2" at 168.074,114 h0.79; PIN_NUMBER "1" at 166.296,114 h0.79; DIMENSION "80" at 167.195,112.349 h0.51; DIMENSION "50" at 169.405,113.771 h0.51
C8: PIN_NUMBER "2" at 168.074,89.997 h0.79; PIN_NUMBER "1" at 166.296,89.997 h0.79; DIMENSION "80" at 167.195,88.346 h0.51; DIMENSION "50" at 169.405,89.768 h0.51
C8: PIN_NUMBER "2" at 168.074,65.994 h0.79; PIN_NUMBER "1" at 166.296,65.994 h0.79; DIMENSION "80" at 167.195,64.343 h0.51; DIMENSION "50" at 169.405,65.765 h0.51
C8: PIN_NUMBER "2" at 168.074,41.991 h0.79; PIN_NUMBER "1" at 166.296,41.991 h0.79; DIMENSION "80" at 167.195,40.34 h0.51; DIMENSION "50" at 169.405,41.762 h0.51
C9: PIN_NUMBER "2" at 177.185,104.111 h0.79 r270; PIN_NUMBER "1" at 177.185,105.889 h0.79 r270; DIMENSION "80" at 175.849,105.305 h0.51 r270; DIMENSION "50" at 177.271,103.095 h0.51 r270
C9: PIN_NUMBER "2" at 177.185,80.108 h0.79 r270; PIN_NUMBER "1" at 177.185,81.886 h0.79 r270; DIMENSION "80" at 175.849,81.302 h0.51 r270; DIMENSION "50" at 177.271,79.092 h0.51 r270
C9: PIN_NUMBER "2" at 177.185,56.105 h0.79 r270; PIN_NUMBER "1" at 177.185,57.883 h0.79 r270; DIMENSION "80" at 175.849,57.299 h0.51 r270; DIMENSION "50" at 177.271,55.089 h0.51 r270
C9: PIN_NUMBER "2" at 177.185,32.102 h0.79 r270; PIN_NUMBER "1" at 177.185,33.88 h0.79 r270; DIMENSION "80" at 175.849,33.296 h0.51 r270; DIMENSION "50" at 177.271,31.086 h0.51 r270
D1: PIN_NUMBER "2" at 162.185,109.262 h0.79 r90; PIN_NUMBER "1" at 162.185,112.738 h0.79 r90
D1: PIN_NUMBER "2" at 162.185,85.259 h0.79 r90; PIN_NUMBER "1" at 162.185,88.735 h0.79 r90
D1: PIN_NUMBER "2" at 162.185,61.256 h0.79 r90; PIN_NUMBER "1" at 162.185,64.732 h0.79 r90
D1: PIN_NUMBER "2" at 162.185,37.253 h0.79 r90; PIN_NUMBER "1" at 162.185,40.729 h0.79 r90
J1: PIN_NUMBER "3" at 115.246,106.19 h0.64 r90; PIN_NUMBER "4" at 115.246,108.69 h0.64 r90; PIN_NUMBER "2" at 115.246,103.69 h0.64 r90; PIN_NUMBER "1" at 115.246,101.19 h0.64 r90; ASSEMBLY_TOP "HAMP" at 114.647,101.19 h0.79 r90; ASSEMBLY_TOP "#TOL" at 114.647,101.19 h0.79 r90; ASSEMBLY_TOP "HEADER 4" at 113.387,101.19 h0.79 r90
J1: PIN_NUMBER "3" at 115.246,82.187 h0.64 r90; PIN_NUMBER "4" at 115.246,84.687 h0.64 r90; PIN_NUMBER "2" at 115.246,79.687 h0.64 r90; PIN_NUMBER "1" at 115.246,77.187 h0.64 r90; ASSEMBLY_TOP "HAMP" at 114.647,77.187 h0.79 r90; ASSEMBLY_TOP "#TOL" at 114.647,77.187 h0.79 r90; ASSEMBLY_TOP "HEADER 4" at 113.387,77.187 h0.79 r90
J1: PIN_NUMBER "3" at 115.246,58.184 h0.64 r90; PIN_NUMBER "4" at 115.246,60.684 h0.64 r90; PIN_NUMBER "2" at 115.246,55.684 h0.64 r90; PIN_NUMBER "1" at 115.246,53.184 h0.64 r90; ASSEMBLY_TOP "HAMP" at 114.647,53.184 h0.79 r90; ASSEMBLY_TOP "#TOL" at 114.647,53.184 h0.79 r90; ASSEMBLY_TOP "HEADER 4" at 113.387,53.184 h0.79 r90
J1: PIN_NUMBER "3" at 115.246,34.181 h0.64 r90; PIN_NUMBER "4" at 115.246,36.681 h0.64 r90; PIN_NUMBER "2" at 115.246,31.681 h0.64 r90; PIN_NUMBER "1" at 115.246,29.181 h0.64 r90; ASSEMBLY_TOP "HAMP" at 114.647,29.181 h0.79 r90; ASSEMBLY_TOP "#TOL" at 114.647,29.181 h0.79 r90; ASSEMBLY_TOP "HEADER 4" at 113.387,29.181 h0.79 r90
J2: PIN_NUMBER "3" at 182.992,105.27 h0.64 r270; PIN_NUMBER "2" at 182.992,106.27 h0.64 r270; PIN_NUMBER "1" at 182.992,107.27 h0.64 r270
J2: PIN_NUMBER "3" at 182.992,81.267 h0.64 r270; PIN_NUMBER "2" at 182.992,82.267 h0.64 r270; PIN_NUMBER "1" at 182.992,83.267 h0.64 r270
J2: PIN_NUMBER "3" at 182.992,57.264 h0.64 r270; PIN_NUMBER "2" at 182.992,58.264 h0.64 r270; PIN_NUMBER "1" at 182.992,59.264 h0.64 r270
J2: PIN_NUMBER "3" at 182.992,33.261 h0.64 r270; PIN_NUMBER "2" at 182.992,34.261 h0.64 r270; PIN_NUMBER "1" at 182.992,35.261 h0.64 r270
L1: PIN_NUMBER "1" at 166.169,108 h0.79; PIN_NUMBER "2" at 168.201,108 h0.79
L1: PIN_NUMBER "1" at 166.169,83.997 h0.79; PIN_NUMBER "2" at 168.201,83.997 h0.79
L1: PIN_NUMBER "1" at 166.169,59.994 h0.79; PIN_NUMBER "2" at 168.201,59.994 h0.79
L1: PIN_NUMBER "1" at 166.169,35.991 h0.79; PIN_NUMBER "2" at 168.201,35.991 h0.79
Q1: PIN_NUMBER "2" at 122.106,101.06 h0.79 r270; PIN_NUMBER "3" at 124.265,102 h0.79 r270; PIN_NUMBER "1" at 122.106,102.94 h0.79 r270
Q1: PIN_NUMBER "2" at 122.106,77.057 h0.79 r270; PIN_NUMBER "3" at 124.265,77.997 h0.79 r270; PIN_NUMBER "1" at 122.106,78.937 h0.79 r270
Q1: PIN_NUMBER "2" at 122.106,53.054 h0.79 r270; PIN_NUMBER "3" at 124.265,53.994 h0.79 r270; PIN_NUMBER "1" at 122.106,54.934 h0.79 r270
Q1: PIN_NUMBER "2" at 122.106,29.051 h0.79 r270; PIN_NUMBER "3" at 124.265,29.991 h0.79 r270; PIN_NUMBER "1" at 122.106,30.931 h0.79 r270
Q2: PIN_NUMBER "3" at 130.265,113 h0.79 r270; PIN_NUMBER "2" at 128.106,112.06 h0.79 r270; PIN_NUMBER "1" at 128.106,113.94 h0.79 r270
Q2: PIN_NUMBER "3" at 130.265,88.997 h0.79 r270; PIN_NUMBER "2" at 128.106,88.057 h0.79 r270; PIN_NUMBER "1" at 128.106,89.937 h0.79 r270
Q2: PIN_NUMBER "3" at 130.265,64.994 h0.79 r270; PIN_NUMBER "2" at 128.106,64.054 h0.79 r270; PIN_NUMBER "1" at 128.106,65.934 h0.79 r270
Q2: PIN_NUMBER "3" at 130.265,40.991 h0.79 r270; PIN_NUMBER "2" at 128.106,40.051 h0.79 r270; PIN_NUMBER "1" at 128.106,41.931 h0.79 r270
R1: PIN_NUMBER "2" at 124.074,96 h0.79; PIN_NUMBER "1" at 122.296,96 h0.79; DIMENSION "80" at 123.195,94.349 h0.51; DIMENSION "50" at 125.405,95.771 h0.51
R1: PIN_NUMBER "2" at 124.074,71.997 h0.79; PIN_NUMBER "1" at 122.296,71.997 h0.79; DIMENSION "80" at 123.195,70.346 h0.51; DIMENSION "50" at 125.405,71.768 h0.51
R1: PIN_NUMBER "2" at 124.074,47.994 h0.79; PIN_NUMBER "1" at 122.296,47.994 h0.79; DIMENSION "80" at 123.195,46.343 h0.51; DIMENSION "50" at 125.405,47.765 h0.51
R1: PIN_NUMBER "2" at 124.074,23.991 h0.79; PIN_NUMBER "1" at 122.296,23.991 h0.79; DIMENSION "80" at 123.195,22.34 h0.51; DIMENSION "50" at 125.405,23.762 h0.51
R2: PIN_NUMBER "2" at 124.074,99 h0.79; PIN_NUMBER "1" at 122.296,99 h0.79; DIMENSION "80" at 123.195,97.349 h0.51; DIMENSION "50" at 125.405,98.771 h0.51
R2: PIN_NUMBER "2" at 124.074,74.997 h0.79; PIN_NUMBER "1" at 122.296,74.997 h0.79; DIMENSION "80" at 123.195,73.346 h0.51; DIMENSION "50" at 125.405,74.768 h0.51
R2: PIN_NUMBER "2" at 124.074,50.994 h0.79; PIN_NUMBER "1" at 122.296,50.994 h0.79; DIMENSION "80" at 123.195,49.343 h0.51; DIMENSION "50" at 125.405,50.765 h0.51
R2: PIN_NUMBER "2" at 124.074,26.991 h0.79; PIN_NUMBER "1" at 122.296,26.991 h0.79; DIMENSION "80" at 123.195,25.34 h0.51; DIMENSION "50" at 125.405,26.762 h0.51
R3: PIN_NUMBER "2" at 124.074,108 h0.79; PIN_NUMBER "1" at 122.296,108 h0.79; DIMENSION "80" at 123.195,106.349 h0.51; DIMENSION "50" at 125.405,107.771 h0.51
R3: PIN_NUMBER "2" at 124.074,83.997 h0.79; PIN_NUMBER "1" at 122.296,83.997 h0.79; DIMENSION "80" at 123.195,82.346 h0.51; DIMENSION "50" at 125.405,83.768 h0.51
R3: PIN_NUMBER "2" at 124.074,59.994 h0.79; PIN_NUMBER "1" at 122.296,59.994 h0.79; DIMENSION "80" at 123.195,58.343 h0.51; DIMENSION "50" at 125.405,59.765 h0.51
R3: PIN_NUMBER "2" at 124.074,35.991 h0.79; PIN_NUMBER "1" at 122.296,35.991 h0.79; DIMENSION "80" at 123.195,34.34 h0.51; DIMENSION "50" at 125.405,35.762 h0.51
R4: PIN_NUMBER "1" at 122.296,105 h0.79; PIN_NUMBER "2" at 124.074,105 h0.79; DIMENSION "80" at 123.195,103.349 h0.51; DIMENSION "50" at 125.405,104.771 h0.51
R4: PIN_NUMBER "1" at 122.296,80.997 h0.79; PIN_NUMBER "2" at 124.074,80.997 h0.79; DIMENSION "80" at 123.195,79.346 h0.51; DIMENSION "50" at 125.405,80.768 h0.51
R4: PIN_NUMBER "1" at 122.296,56.994 h0.79; PIN_NUMBER "2" at 124.074,56.994 h0.79; DIMENSION "80" at 123.195,55.343 h0.51; DIMENSION "50" at 125.405,56.765 h0.51
R4: PIN_NUMBER "1" at 122.296,32.991 h0.79; PIN_NUMBER "2" at 124.074,32.991 h0.79; DIMENSION "80" at 123.195,31.34 h0.51; DIMENSION "50" at 125.405,32.762 h0.51
R5: PIN_NUMBER "1" at 124.074,111 h0.79 r180; PIN_NUMBER "2" at 122.296,111 h0.79 r180; DIMENSION "80" at 123.805,112.651 h0.51 r180; DIMENSION "50" at 121.595,111.229 h0.51 r180
R5: PIN_NUMBER "1" at 124.074,86.997 h0.79 r180; PIN_NUMBER "2" at 122.296,86.997 h0.79 r180; DIMENSION "80" at 123.805,88.648 h0.51 r180; DIMENSION "50" at 121.595,87.226 h0.51 r180
R5: PIN_NUMBER "1" at 124.074,62.994 h0.79 r180; PIN_NUMBER "2" at 122.296,62.994 h0.79 r180; DIMENSION "80" at 123.805,64.645 h0.51 r180; DIMENSION "50" at 121.595,63.223 h0.51 r180
R5: PIN_NUMBER "1" at 124.074,38.991 h0.79 r180; PIN_NUMBER "2" at 122.296,38.991 h0.79 r180; DIMENSION "80" at 123.805,40.642 h0.51 r180; DIMENSION "50" at 121.595,39.22 h0.51 r180
R6: PIN_NUMBER "1" at 152.074,99 h0.79 r180; PIN_NUMBER "2" at 150.296,99 h0.79 r180; DIMENSION "80" at 151.805,100.651 h0.51 r180; DIMENSION "50" at 149.595,99.229 h0.51 r180
R6: PIN_NUMBER "1" at 152.074,74.997 h0.79 r180; PIN_NUMBER "2" at 150.296,74.997 h0.79 r180; DIMENSION "80" at 151.805,76.648 h0.51 r180; DIMENSION "50" at 149.595,75.226 h0.51 r180
R6: PIN_NUMBER "1" at 152.074,50.994 h0.79 r180; PIN_NUMBER "2" at 150.296,50.994 h0.79 r180; DIMENSION "80" at 151.805,52.645 h0.51 r180; DIMENSION "50" at 149.595,51.223 h0.51 r180
R6: PIN_NUMBER "1" at 152.074,26.991 h0.79 r180; PIN_NUMBER "2" at 150.296,26.991 h0.79 r180; DIMENSION "80" at 151.805,28.642 h0.51 r180; DIMENSION "50" at 149.595,27.22 h0.51 r180
R7: PIN_NUMBER "2" at 141.296,99 h0.79 r180; PIN_NUMBER "1" at 143.074,99 h0.79 r180; DIMENSION "80" at 142.805,100.651 h0.51 r180; DIMENSION "50" at 140.595,99.229 h0.51 r180
R7: PIN_NUMBER "2" at 141.296,74.997 h0.79 r180; PIN_NUMBER "1" at 143.074,74.997 h0.79 r180; DIMENSION "80" at 142.805,76.648 h0.51 r180; DIMENSION "50" at 140.595,75.226 h0.51 r180
R7: PIN_NUMBER "2" at 141.296,50.994 h0.79 r180; PIN_NUMBER "1" at 143.074,50.994 h0.79 r180; DIMENSION "80" at 142.805,52.645 h0.51 r180; DIMENSION "50" at 140.595,51.223 h0.51 r180
R7: PIN_NUMBER "2" at 141.296,26.991 h0.79 r180; PIN_NUMBER "1" at 143.074,26.991 h0.79 r180; DIMENSION "80" at 142.805,28.642 h0.51 r180; DIMENSION "50" at 140.595,27.22 h0.51 r180
R8: PIN_NUMBER "2" at 155.296,108 h0.79 r180; PIN_NUMBER "1" at 157.074,108 h0.79 r180; DIMENSION "80" at 156.805,109.651 h0.51 r180; DIMENSION "50" at 154.595,108.229 h0.51 r180
R8: PIN_NUMBER "2" at 155.296,83.997 h0.79 r180; PIN_NUMBER "1" at 157.074,83.997 h0.79 r180; DIMENSION "80" at 156.805,85.648 h0.51 r180; DIMENSION "50" at 154.595,84.226 h0.51 r180
R8: PIN_NUMBER "2" at 155.296,59.994 h0.79 r180; PIN_NUMBER "1" at 157.074,59.994 h0.79 r180; DIMENSION "80" at 156.805,61.645 h0.51 r180; DIMENSION "50" at 154.595,60.223 h0.51 r180
R8: PIN_NUMBER "2" at 155.296,35.991 h0.79 r180; PIN_NUMBER "1" at 157.074,35.991 h0.79 r180; DIMENSION "80" at 156.805,37.642 h0.51 r180; DIMENSION "50" at 154.595,36.22 h0.51 r180
R9: PIN_NUMBER "2" at 157.074,105 h0.79; PIN_NUMBER "1" at 155.296,105 h0.79; DIMENSION "80" at 156.195,103.349 h0.51; DIMENSION "50" at 158.405,104.771 h0.51
R9: PIN_NUMBER "2" at 157.074,80.997 h0.79; PIN_NUMBER "1" at 155.296,80.997 h0.79; DIMENSION "80" at 156.195,79.346 h0.51; DIMENSION "50" at 158.405,80.768 h0.51
R9: PIN_NUMBER "2" at 157.074,56.994 h0.79; PIN_NUMBER "1" at 155.296,56.994 h0.79; DIMENSION "80" at 156.195,55.343 h0.51; DIMENSION "50" at 158.405,56.765 h0.51
R9: PIN_NUMBER "2" at 157.074,32.991 h0.79; PIN_NUMBER "1" at 155.296,32.991 h0.79; DIMENSION "80" at 156.195,31.34 h0.51; DIMENSION "50" at 158.405,32.762 h0.51
R10: PIN_NUMBER "1" at 134.296,111 h0.79; PIN_NUMBER "2" at 136.074,111 h0.79; DIMENSION "80" at 135.195,109.349 h0.51; DIMENSION "50" at 137.405,110.771 h0.51
R10: PIN_NUMBER "1" at 134.296,86.997 h0.79; PIN_NUMBER "2" at 136.074,86.997 h0.79; DIMENSION "80" at 135.195,85.346 h0.51; DIMENSION "50" at 137.405,86.768 h0.51
R10: PIN_NUMBER "1" at 134.296,62.994 h0.79; PIN_NUMBER "2" at 136.074,62.994 h0.79; DIMENSION "80" at 135.195,61.343 h0.51; DIMENSION "50" at 137.405,62.765 h0.51
R10: PIN_NUMBER "1" at 134.296,38.991 h0.79; PIN_NUMBER "2" at 136.074,38.991 h0.79; DIMENSION "80" at 135.195,37.34 h0.51; DIMENSION "50" at 137.405,38.762 h0.51
R11: PIN_NUMBER "2" at 150.296,108 h0.79 r180; PIN_NUMBER "1" at 152.074,108 h0.79 r180; DIMENSION "80" at 151.805,109.651 h0.51 r180; DIMENSION "50" at 149.595,108.229 h0.51 r180
R11: PIN_NUMBER "2" at 150.296,83.997 h0.79 r180; PIN_NUMBER "1" at 152.074,83.997 h0.79 r180; DIMENSION "80" at 151.805,85.648 h0.51 r180; DIMENSION "50" at 149.595,84.226 h0.51 r180
R11: PIN_NUMBER "2" at 150.296,59.994 h0.79 r180; PIN_NUMBER "1" at 152.074,59.994 h0.79 r180; DIMENSION "80" at 151.805,61.645 h0.51 r180; DIMENSION "50" at 149.595,60.223 h0.51 r180
R11: PIN_NUMBER "2" at 150.296,35.991 h0.79 r180; PIN_NUMBER "1" at 152.074,35.991 h0.79 r180; DIMENSION "80" at 151.805,37.642 h0.51 r180; DIMENSION "50" at 149.595,36.22 h0.51 r180
R12: PIN_NUMBER "2" at 152.074,105 h0.79; PIN_NUMBER "1" at 150.296,105 h0.79; DIMENSION "80" at 151.195,103.349 h0.51; DIMENSION "50" at 153.405,104.771 h0.51
R12: PIN_NUMBER "2" at 152.074,80.997 h0.79; PIN_NUMBER "1" at 150.296,80.997 h0.79; DIMENSION "80" at 151.195,79.346 h0.51; DIMENSION "50" at 153.405,80.768 h0.51
R12: PIN_NUMBER "2" at 152.074,56.994 h0.79; PIN_NUMBER "1" at 150.296,56.994 h0.79; DIMENSION "80" at 151.195,55.343 h0.51; DIMENSION "50" at 153.405,56.765 h0.51
R12: PIN_NUMBER "2" at 152.074,32.991 h0.79; PIN_NUMBER "1" at 150.296,32.991 h0.79; DIMENSION "80" at 151.195,31.34 h0.51; DIMENSION "50" at 153.405,32.762 h0.51
R13: PIN_NUMBER "2" at 150.296,111 h0.79 r180; PIN_NUMBER "1" at 152.074,111 h0.79 r180; DIMENSION "80" at 151.805,112.651 h0.51 r180; DIMENSION "50" at 149.595,111.229 h0.51 r180
R13: PIN_NUMBER "2" at 150.296,86.997 h0.79 r180; PIN_NUMBER "1" at 152.074,86.997 h0.79 r180; DIMENSION "80" at 151.805,88.648 h0.51 r180; DIMENSION "50" at 149.595,87.226 h0.51 r180
R13: PIN_NUMBER "2" at 150.296,62.994 h0.79 r180; PIN_NUMBER "1" at 152.074,62.994 h0.79 r180; DIMENSION "80" at 151.805,64.645 h0.51 r180; DIMENSION "50" at 149.595,63.223 h0.51 r180
R13: PIN_NUMBER "2" at 150.296,38.991 h0.79 r180; PIN_NUMBER "1" at 152.074,38.991 h0.79 r180; DIMENSION "80" at 151.805,40.642 h0.51 r180; DIMENSION "50" at 149.595,39.22 h0.51 r180
R14: PIN_NUMBER "2" at 136.074,114 h0.79; PIN_NUMBER "1" at 134.296,114 h0.79; DIMENSION "80" at 135.195,112.349 h0.51; DIMENSION "50" at 137.405,113.771 h0.51
R14: PIN_NUMBER "2" at 136.074,89.997 h0.79; PIN_NUMBER "1" at 134.296,89.997 h0.79; DIMENSION "80" at 135.195,88.346 h0.51; DIMENSION "50" at 137.405,89.768 h0.51
R14: PIN_NUMBER "2" at 136.074,65.994 h0.79; PIN_NUMBER "1" at 134.296,65.994 h0.79; DIMENSION "80" at 135.195,64.343 h0.51; DIMENSION "50" at 137.405,65.765 h0.51
R14: PIN_NUMBER "2" at 136.074,41.991 h0.79; PIN_NUMBER "1" at 134.296,41.991 h0.79; DIMENSION "80" at 135.195,40.34 h0.51; DIMENSION "50" at 137.405,41.762 h0.51
R15: PIN_NUMBER "2" at 143.074,114 h0.79; PIN_NUMBER "1" at 141.296,114 h0.79; DIMENSION "80" at 142.195,112.349 h0.51; DIMENSION "50" at 144.405,113.771 h0.51
R15: PIN_NUMBER "2" at 143.074,89.997 h0.79; PIN_NUMBER "1" at 141.296,89.997 h0.79; DIMENSION "80" at 142.195,88.346 h0.51; DIMENSION "50" at 144.405,89.768 h0.51
R15: PIN_NUMBER "2" at 143.074,65.994 h0.79; PIN_NUMBER "1" at 141.296,65.994 h0.79; DIMENSION "80" at 142.195,64.343 h0.51; DIMENSION "50" at 144.405,65.765 h0.51
R15: PIN_NUMBER "2" at 143.074,41.991 h0.79; PIN_NUMBER "1" at 141.296,41.991 h0.79; DIMENSION "80" at 142.195,40.34 h0.51; DIMENSION "50" at 144.405,41.762 h0.51
R16: PIN_NUMBER "2" at 179.074,111 h0.79; PIN_NUMBER "1" at 177.296,111 h0.79; DIMENSION "80" at 178.195,109.349 h0.51; DIMENSION "50" at 180.405,110.771 h0.51
R16: PIN_NUMBER "2" at 179.074,86.997 h0.79; PIN_NUMBER "1" at 177.296,86.997 h0.79; DIMENSION "80" at 178.195,85.346 h0.51; DIMENSION "50" at 180.405,86.768 h0.51
R16: PIN_NUMBER "2" at 179.074,62.994 h0.79; PIN_NUMBER "1" at 177.296,62.994 h0.79; DIMENSION "80" at 178.195,61.343 h0.51; DIMENSION "50" at 180.405,62.765 h0.51
R16: PIN_NUMBER "2" at 179.074,38.991 h0.79; PIN_NUMBER "1" at 177.296,38.991 h0.79; DIMENSION "80" at 178.195,37.34 h0.51; DIMENSION "50" at 180.405,38.762 h0.51
R17: PIN_NUMBER "1" at 171.296,114 h0.79; PIN_NUMBER "2" at 173.074,114 h0.79; DIMENSION "80" at 172.195,112.349 h0.51; DIMENSION "50" at 174.405,113.771 h0.51
R17: PIN_NUMBER "1" at 171.296,89.997 h0.79; PIN_NUMBER "2" at 173.074,89.997 h0.79; DIMENSION "80" at 172.195,88.346 h0.51; DIMENSION "50" at 174.405,89.768 h0.51
R17: PIN_NUMBER "1" at 171.296,65.994 h0.79; PIN_NUMBER "2" at 173.074,65.994 h0.79; DIMENSION "80" at 172.195,64.343 h0.51; DIMENSION "50" at 174.405,65.765 h0.51